# Altium PCB PCB.PcbDoc
Units mm, origin at the board's own origin, x right, y up, seen from the top; angles counter-clockwise.
Board outline 27.18 x 42.04 mm, 2 copper layers (Top Layer, Bottom Layer); 2 components, 22 nets, 20 pads, 0 vias.
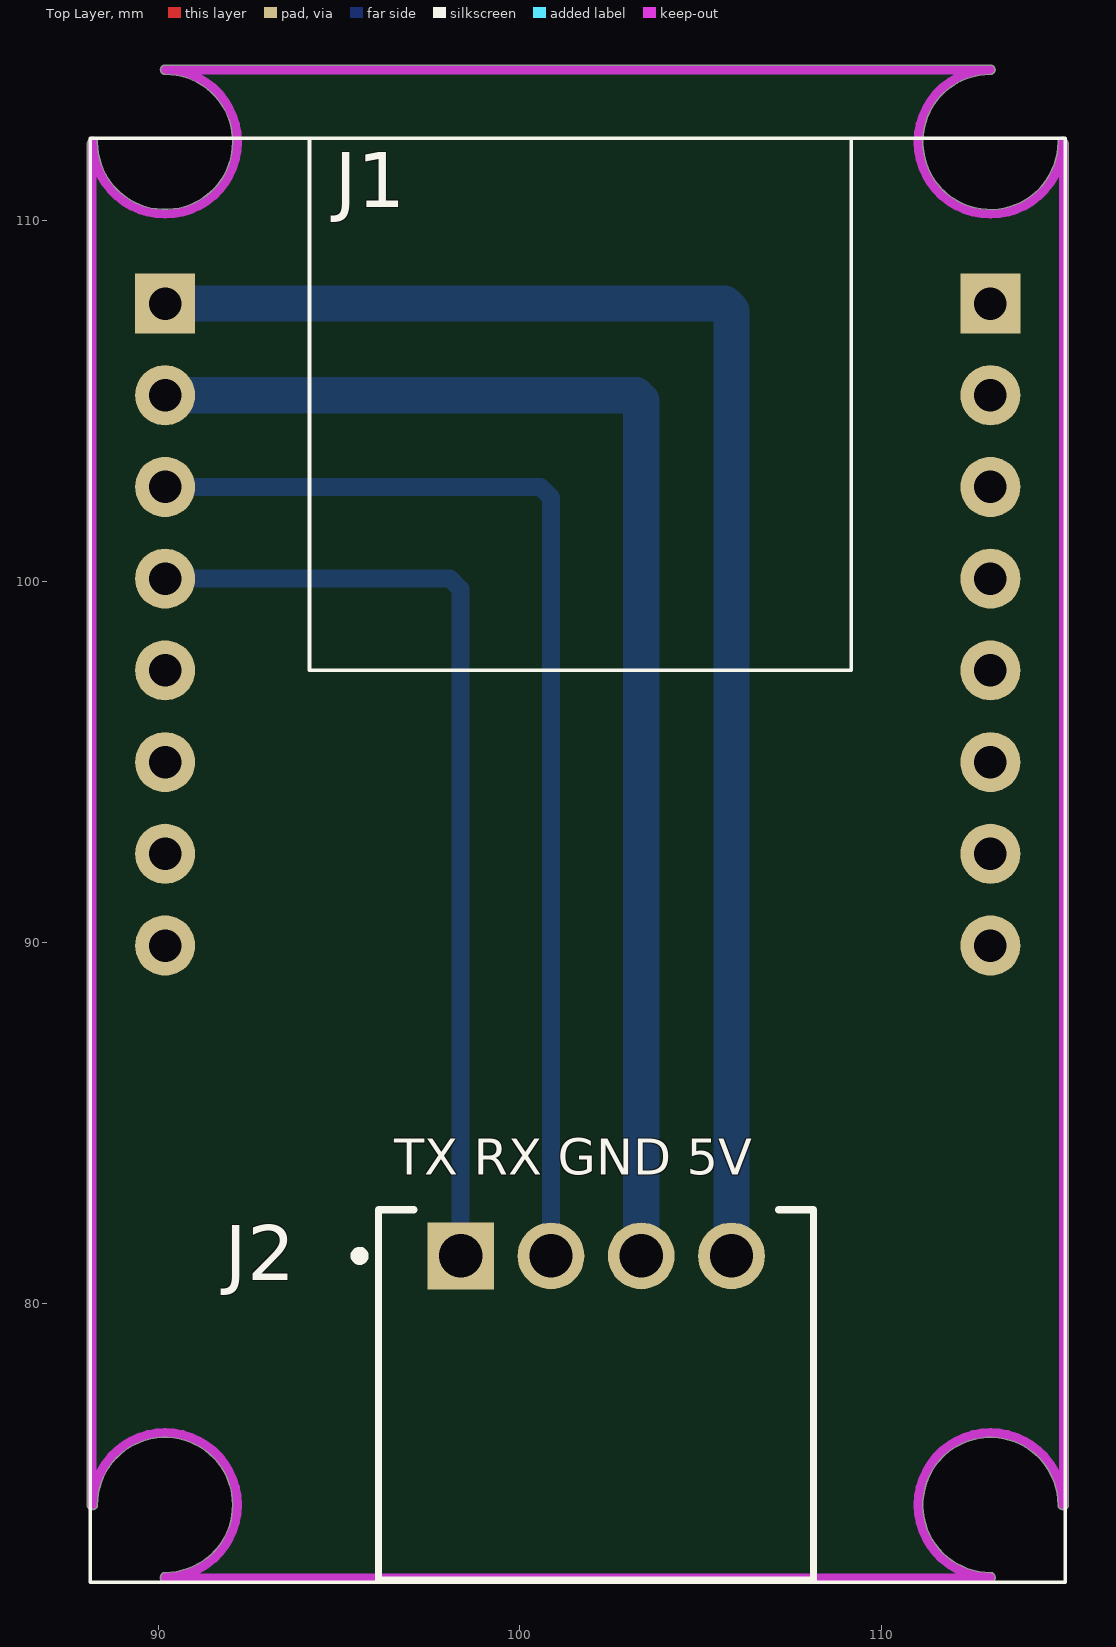
[diagram p0: Top Layer view]
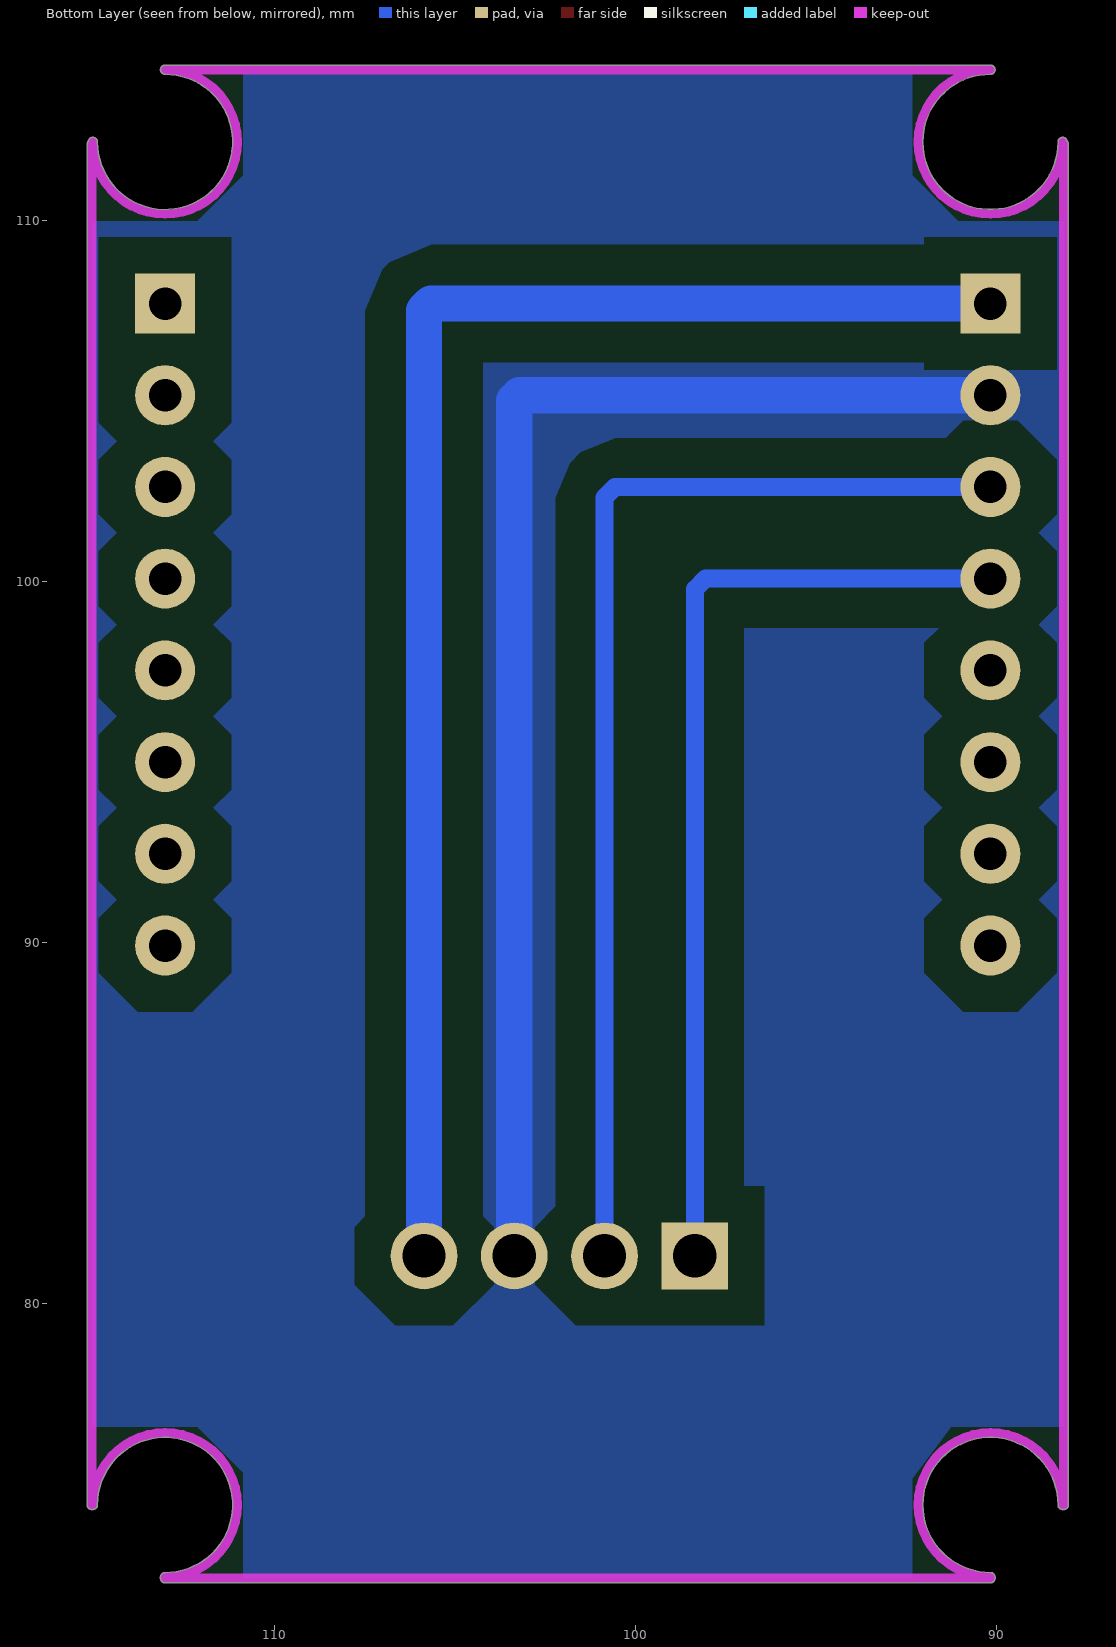
[diagram p1: Bottom Layer view, seen from below]

## Layer stack, top to bottom
Top Solder: solder mask 0.0102, Solder Resist, Dk 3.5
Top Layer: signal copper 0.0356
Dielectric 1: dielectric 0.32, FR-4, Dk 4.8
Bottom Layer: signal copper 0.0356
Bottom Solder: solder mask 0.0102, Solder Resist, Dk 3.5

## Board outline
88.154,74.296 ccw(c88.17,74.422) 88.297,74.422 cw(c90.17,74.422) 92.043,74.422 cw(c90.17,74.422) 90.17,72.549 ccw(c90.17,72.422) 90.044,72.406 ccw(c90.17,72.39) 90.17,72.263 113.03,72.263 ccw(c113.03,72.39) 113.157,72.39 113.157,72.422 ccw(c113.03,72.422) 113.03,72.549 cw(c113.03,74.422) 114.903,74.422 ccw(c115.03,74.422) 115.046,74.296 ccw(c115.062,74.422) 115.189,74.422 115.189,112.141 115.135,112.246 ccw(c115.03,112.173) 114.903,112.173 cw(c113.03,112.173) 113.03,114.046 ccw(c113.03,114.173) 113.157,114.173 ccw(c113.03,114.173) 113.03,114.3 90.17,114.3 ccw(c90.17,114.173) 90.17,114.046 cw(c90.17,112.173) 92.043,112.173 cw(c90.17,112.173) 88.297,112.173 ccw(c88.17,112.173) 88.065,112.246 88.011,112.141 88.011,74.422 ccw(c88.138,74.422)

## Design rules (kind name [scope] priority, off if disabled: settings)
Clearance Clearance_9 [InNamedPolygon('GND_L02_P000')] p1: gap=1 ignorepadtopadclearanceinfootprint=TRUE
Clearance Clearance_8 [InNamedPolygon('GND_L02_P000')] p2: gap=0.254 ignorepadtopadclearanceinfootprint=FALSE
Clearance Clearance_7 [InNamedPolygon('GND_L02_P000')] p3: gap=1 ignorepadtopadclearanceinfootprint=FALSE
Clearance Clearance_6 [InNamedPolygon('GND_L02_P000')] p4: gap=0.254 ignorepadtopadclearanceinfootprint=FALSE except(0: Arc-Hole Track-Hole SMDPad-Hole THPad-Hole Via-Hole Fill-Hole Poly-Hole Region-Hole Text-Hole)
Clearance Clearance_5 [InNamedPolygon('GND_L02_P000')] p5: gap=1 ignorepadtopadclearanceinfootprint=FALSE
Clearance Clearance_4 [InNamedPolygon('GND_L02_P000')] p6: gap=1 ignorepadtopadclearanceinfootprint=FALSE
Clearance Clearance_3 [InNamedPolygon('GND_L02_P000')] p7: gap=2 ignorepadtopadclearanceinfootprint=FALSE
Clearance Clearance_2 [InNamedPolygon('GND_L02_P000')] p8: gap=1 ignorepadtopadclearanceinfootprint=FALSE
Clearance Clearance_1 [InNamedPolygon('GND_L02_P000')] p9: gap=2 ignorepadtopadclearanceinfootprint=FALSE
Clearance [All] p10: gap=0.254 ignorepadtopadclearanceinfootprint=FALSE except(0: Arc-Hole Track-Hole SMDPad-Hole THPad-Hole Via-Hole Fill-Hole Poly-Hole Region-Hole Text-Hole)
ComponentClearance [All] p1: gap=0.254 collisioncheckmode=3 verticalgap=0.254 showdistances=FALSE donotcheckwithout3dbody=TRUE
PolygonConnect PolygonConnect_1 [All vs IsNamedPolygon('GND_L02_P000')] p1: thpad.connectstyle=Direct thpad.reliefconductorwidth=0.254 thpad.reliefentries=4 thpad.polygonreliefangle="90 Angle" thpad.airgapwidth=0.254 smdpad.connectstyle=Relief smdpad.reliefconductorwidth=0.254 smdpad.reliefentries=4 smdpad.polygonreliefangle="90 Angle" smdpad.airgapwidth=0.254 via.connectstyle=Relief via.reliefconductorwidth=0.254 via.reliefentries=4 via.polygonreliefangle="90 Angle" via.airgapwidth=0.254
PolygonConnect [All] p2: connectstyle=Relief reliefconductorwidth=0.254 reliefentries=4 polygonreliefangle="90 Angle" airgapwidth=0.254
RoutingVias [All] p1: holewidth=0.711 width=1.27 viastyle="Through Hole" minholewidth=0.711 minwidth=1.27 maxholewidth=0.711 maxwidth=1.27
SolderMaskExpansion [All] p1: expansion=0.102 istentingtop=FALSE
Width [All] p1: maxlimit=2 minlimit=0.254 preferedwidth=0.5 toplayer_maxwidth=0.254 toplayer_prefwidth=0.254 minimp=50.000000 maximp=50.000000 favimp=50.000000
29 further rules are at their usual default settings.

## Components (designator, comment, footprint, x,y, rotation, side; value= is the part's Value field where it differs from the comment)
J1 "ESP32-CAM" ESP32-CAM 90.17,89.916 r0 top
J2 "Arduino" FP-1881464-MFG 102.108,77.47 r0 top

## Footprints (in the part's own frame and the unit in brackets; to place one, negate y for a bottom-side part, rotate by r counter-clockwise, add the part's x,y. Pads: shape width x height; smd on the part's side, far side on the other; paste and mask are expansions set on the pad)
ESP32-CAM [mm]
  round 1.665 hole 0.9: 1(0,0) 2(0,2.54) 3(0,5.08) 4(0,7.62) 5(0,10.16) 6(0,12.7) 7(0,15.24) 10(22.86,15.24) 11(22.86,12.7) 12(22.86,10.16) 13(22.86,7.62) 14(22.86,5.08) 15(22.86,2.54) 16(22.86,0)
  rect 1.665x1.665 / inner round 1.665 / far side rect 1.665x1.665 hole 0.9: 8(0,17.78) 9(22.86,17.78)
  silkscreen extent -2.07,-17.64 24.93,22.36
FP-1881464-MFG [mm]
  rect 1.85x1.85 hole 1.2 paste-1000 mask+0: 1(-3.75,3.85)
  round 1.85 hole 1.2 paste-1000 mask+0: 2(-1.25,3.85) 3(1.25,3.85) 4(3.75,3.85)
  silkscreen extent -6.67,-5.13 6.02,5.13, body extent -6.12,-5.23 6.12,5.23, height 0.25

## Part data
J1: "ESP32 ESP32 Transceiver; 802.11 a/b/g/n (Wi-Fi, WiFi, WLAN), BluetoothÂ® Smart 4.x Low Energy (BLE) Evaluation Board", Package=None, Availability=Unavailable, Check_prices=https://www.snapeda.com/parts/ESP32-CAM/AI-Thinker/view-part/?ref=eda, MF=AI-Thinker, MP=ESP32-CAM, Price=None, SnapEDA_Link=https://www.snapeda.com/parts/ESP32-CAM/AI-Thinker/view-part/?ref=snap
J2: library part CMP-09399-000003-1, "TERM BLOCK HDR 4POS 90DEG 2.5MM", Current Rating=4A, Manufacturer="Phoenix Contact", Manufacturer Part Number=1881464, Voltage Rating=160V, Automotive=No, Category=Conn, ComponentLink2Description=Datasheet, ComponentLink2URL=https://www.phoenixcontact.com/online/portal/pi/?uri=pxc-oc-itemdetail:pid=1881464&library=pies&pcck=P-11-02-11&tab=1&selectedCategory=ALL, Conn Gender=Male, Conn Orientation="Right Angle", Contact Material=Tin, Device Class L1=Connectors, Device Class L2="Headers and Wire Housings", Device Class L3=unset, Digikey Description="TERM BLOCK HDR 4POS 90DEG 2.5MM", Height=8.25mm, Lead Free=Yes, Mouser Description="Conn; TermBlk; PCB; Header; SnglLvl; 90DegAngl; Sldr; 4Pole; 2.5mmPitch; COMBICON", Number Of Contacts=4, Number Of Rows=1, Octopart=https://octopart.com/1881464-phoenix+contact-62398, Package=1881464, Pitch=2.5mm, RoHS=TRUE

## Nets (pads, with @x,y where several pads share a name; then routed paths per layer and width w, separated by ;. In a path a pad name is that pad's centre, name@x,y a point inside that pad or via, vN(x,y) a via of type N, cw(c..) or ccw(c..) an arc to the next point about the centre after c; other vN are vias at no path point)
5V: J1.8 J2.4 | length 42
  Bottom Layer w1: J1.8 105.664,107.696 105.858,107.502 J2.4
+5: 
+12: 
COM: 
D5: 
DHT: 
GND: J1.7 J2.3 | length 36.9
  Bottom Layer w1: J1.7 103.209,105.156 103.358,105.007 J2.3
NC: 
NetC5_1: 
NetC6_2: 
NetD1_1: 
NetJ3_3: 
NetLED1_2: 
NetLED2_2: 
NetQ2_1: 
NetQ2_3: 
NetR2_1: 
NO: 
RS: 
RX: J1.6 J2.2 | length 31.8
  Bottom Layer w0.5: J1.6 100.565,102.616 100.858,102.323 J2.2
SOIL: 
TX: J1.5 J2.1 | length 26.8
  Bottom Layer w0.5: J1.5 98.065,100.076 98.358,99.783 J2.1
pads on no net: J1.1 J1.2 J1.3 J1.4 J1.9 J1.10 J1.11 J1.12 J1.13 J1.14 J1.15 J1.16

## Polygon pours and split planes (outlines as drawn)
GND on Bottom Layer "GND_L02_P000" (solid, pour order 0): 110.871,114.046 110.871,111.252 112.141,109.982 115.062,109.982 115.062,76.581 112.141,76.581 110.871,75.311 110.871,72.39 92.329,72.39 92.329,75.142 91.249,76.581 88.138,76.581 88.138,109.982 91.059,109.982 92.329,111.252 92.329,114.046

## Keep-outs
Keep-Out Layer:
  lines w0.254: 88.138,74.422 88.138,112.141 ; 88.17,74.422 cw(c90.17,74.422) 90.17,72.422 ; 88.17,112.173 ccw(c90.17,112.173) 90.17,114.173 113.03,114.173 ccw(c113.03,112.173) 115.03,112.173 ; 90.17,72.39 113.03,72.39 ; 113.03,72.422 cw(c113.03,74.422) 115.03,74.422 ; 115.062,74.422 115.062,112.141

## Silkscreen, mask and mechanical layers (free items; w line width, h text height)
Top Overlay:
  text "TX RX GND 5V" at 96.52,83.566 h1

## Text inside footprints (layer, text, board x,y; h text height)
J1: Top 3D Body "CAM" at 101.6,98.916 h1.27